# Altium PCB PCB2.PcbDoc
Units mil, origin at the board's own origin, x right, y up, seen from the top; angles counter-clockwise.
Board outline 3905 x 1880 mil, 2 copper layers (Top Layer, Bottom Layer); 34 components, 18 nets, 83 pads, 0 vias.
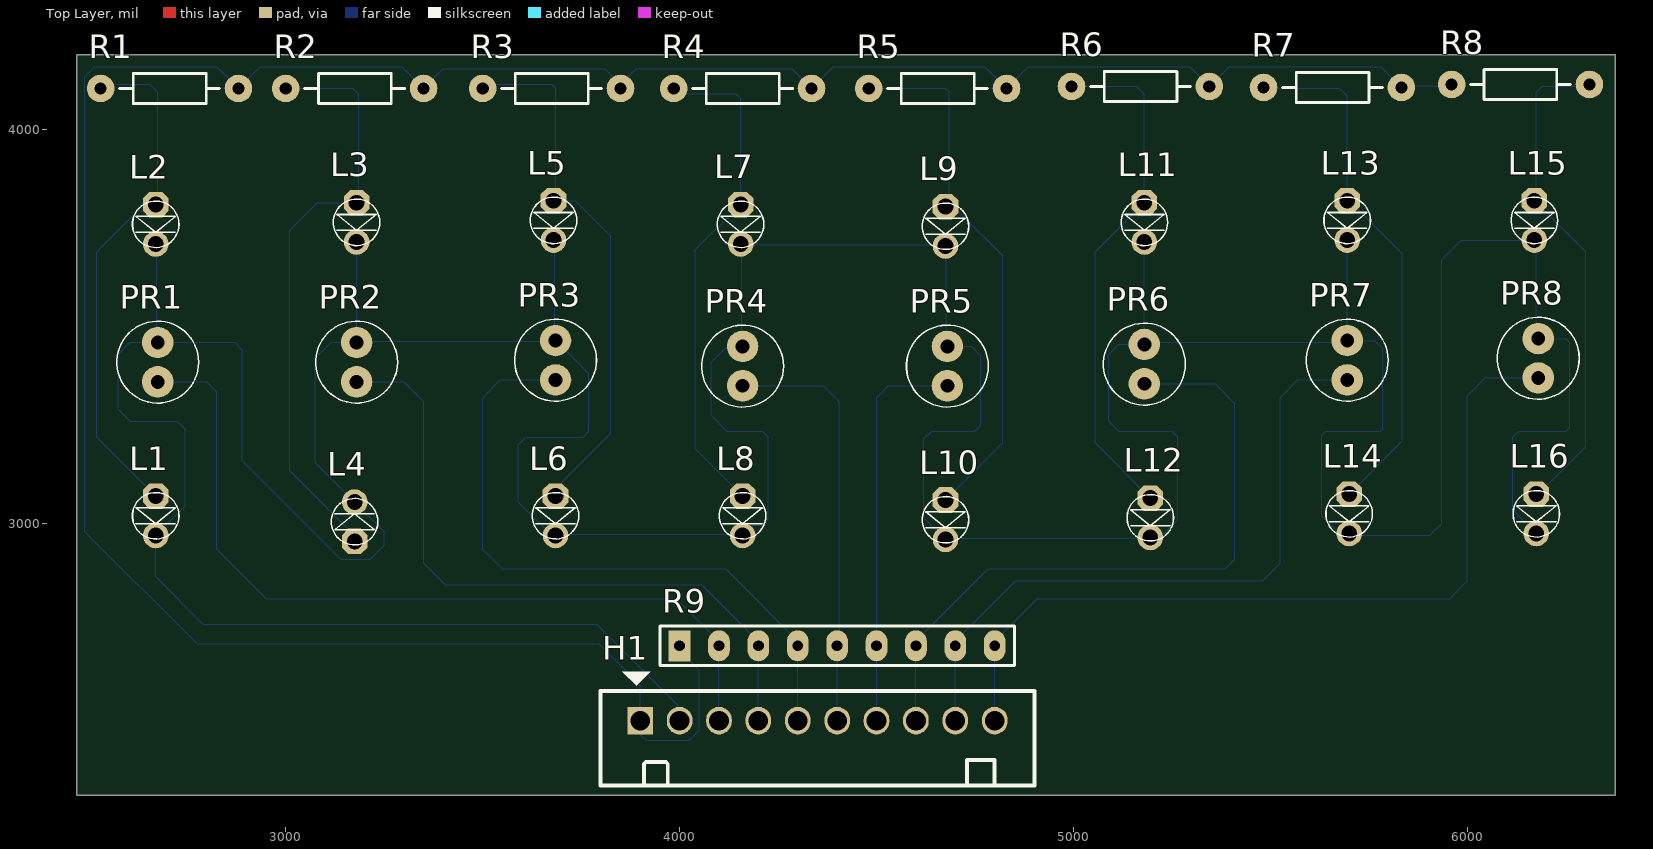
[diagram p0: Top Layer view]
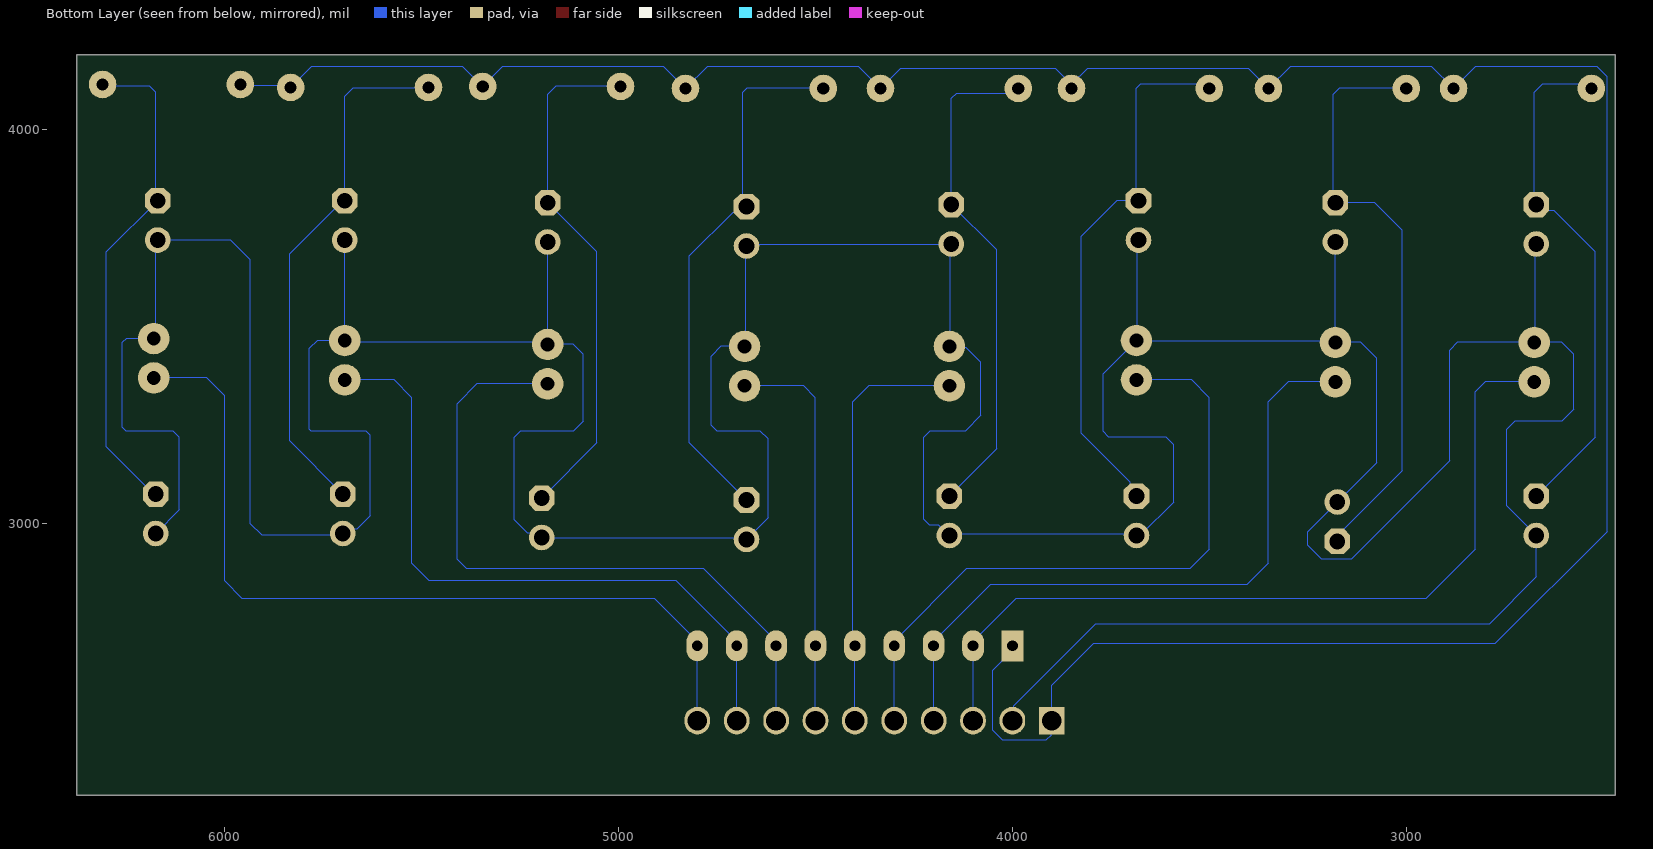
[diagram p1: Bottom Layer view, seen from below]
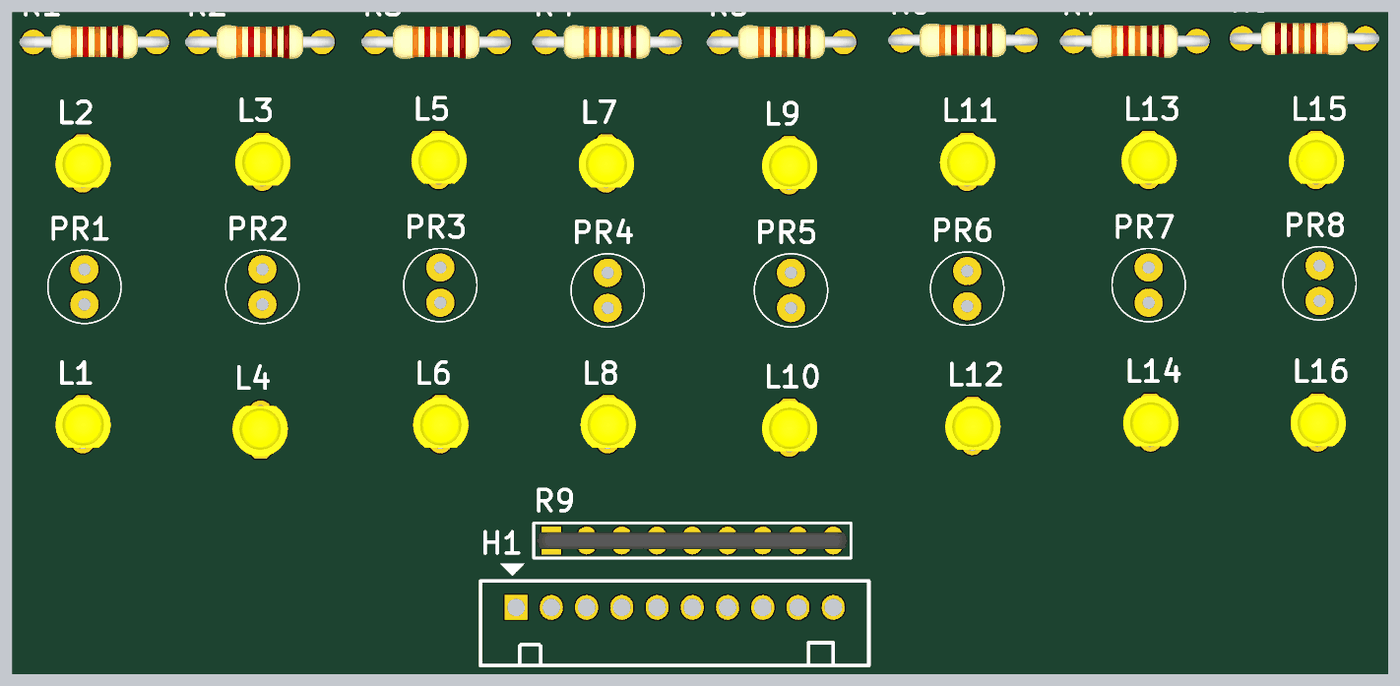
[diagram p2: 3D render of the assembled board from above, using the file's embedded part models]

## Layer stack, top to bottom
Top Solder: solder mask 0.4, Solder Resist, Dk 3.5
Top Layer: signal copper 1.4
Dielectric 1: dielectric 12.6, FR-4, Dk 4.8
Bottom Layer: signal copper 1.4
Bottom Solder: solder mask 0.4, Solder Resist, Dk 3.5

## Board outline
2470,2310 6375,2310 6375,4190 2470,4190

## Design rules (kind name [scope] priority, off if disabled: settings)
Clearance [All] p1: gap=10 ignorepadtopadclearanceinfootprint=FALSE
PolygonConnect [All] p1: connectstyle=Relief reliefconductorwidth=10 reliefentries=4 polygonreliefangle="90 Angle" airgapwidth=10
RoutingVias [All] p1: holewidth=28 width=35 viastyle="Through Hole" minholewidth=28 minwidth=35 maxholewidth=28 maxwidth=35
SolderMaskExpansion [All] p1: expansion=4 istentingtop=FALSE
SupplyNets "Schematic Supply Nets_1" [InNet('GND')] p1: voltage=0.000
SupplyNets "Schematic Supply Nets" [InNet('+5')] p2: voltage=0.000
Width [All] p1: maxlimit=2 minlimit=1 preferedwidth=1.5
30 further rules are at their usual default settings.

## Components (designator, comment, footprint, x,y, rotation, side; value= is the part's Value field where it differs from the comment)
H1 "Header 10P 2.54 Duc Cong" "Header 10P DC 2.54" 3900,2500 r270 top
L1 "LED" LED-3MM-YELLOW 2670,3070 r270 top
L2 "LED" LED-3MM-YELLOW 2670,3810 r270 top
L3 "LED" LED-3MM-YELLOW 3180,3815 r270 top
L4 "LED" LED-3MM-YELLOW 3175,2955 r90 top
L5 "LED" LED-3MM-YELLOW 3680,3820 r270 top
L6 "LED" LED-3MM-YELLOW 3685,3070 r270 top
L7 "LED" LED-3MM-YELLOW 4155,3810 r270 top
L8 "LED" LED-3MM-YELLOW 4160,3070 r270 top
L9 "LED" LED-3MM-YELLOW 4675,3805 r270 top
L10 "LED" LED-3MM-YELLOW 4675,3060 r270 top
L11 "LED" LED-3MM-YELLOW 5180,3815 r270 top
L12 "LED" LED-3MM-YELLOW 5195,3065 r270 top
L13 "LED" LED-3MM-YELLOW 5695,3820 r270 top
L14 "LED" LED-3MM-YELLOW 5700,3075 r270 top
L15 "LED" LED-3MM-YELLOW 6170,3820 r270 top
L16 "LED" LED-3MM-YELLOW 6175,3075 r270 top
PR1 "Quang Tro" "Quang Tro" 2675,3410 r270 top
PR2 "Quang Tro" "Quang Tro" 3180,3410 r270 top
PR3 "Quang Tro" "Quang Tro" 3685,3415 r270 top
PR4 "Quang Tro" "Quang Tro" 4160,3400 r270 top
PR5 "Quang Tro" "Quang Tro" 4680,3400 r270 top
PR6 "Quang Tro" "Quang Tro" 5180,3405 r270 top
PR7 "Quang Tro" "Quang Tro" 5695,3415 r270 top
PR8 "Quang Tro" "Quang Tro" 6180,3420 r270 top
R1 "220" R1/4W 2530,4105 r0 top value="R1/4W - 1K"
R2 "220" R1/4W 3000,4105 r0 top value="R1/4W - 1K"
R3 "220" R1/4W 3500,4105 r0 top value="R1/4W - 1K"
R4 "220" R1/4W 3985,4105 r0 top value="R1/4W - 1K"
R5 "220" R1/4W 4480,4105 r0 top value="R1/4W - 1K"
R6 "220" R1/4W 4995,4110 r0 top value="R1/4W - 1K"
R7 "220" R1/4W 5482.5,4107.5 r0 top value="R1/4W - 1K"
R8 "220" R1/4W 6310,4115 r180 top value="R1/4W - 1K"
R9 "10k" "tro bang a9" 4400,2695 r0 top

## Footprints (in the part's own frame and the unit in brackets; to place one, negate y for a bottom-side part, rotate by r counter-clockwise, add the part's x,y. Pads: shape width x height; smd on the part's side, far side on the other; paste and mask are expansions set on the pad)
"Header 10P DC 2.54" [mil]
  rect 70x65 hole 50: 1(0,0)
  oval 70x65 hole 50: 2(0,100) 3(0,200) 4(0,300) 5(0,400) 6(0,500) 7(0,600) 8(0,700) 9(0,800) 10(0,900)
  silkscreen extent -124,-101 165,1001
LED-3MM-YELLOW [mil]
  oct 65x65 hole 40: 1(0,0)
  round 65 hole 40: 2(100,0)
  silkscreen extent -9,-59 109,59, body extent -27,-77 117,80, height 181
"Quang Tro" [mil]
  round 80 hole 35: 1(-50,0) 2(50,0)
  silkscreen extent -104,-104 104,104
R1/4W [mil] "R 1/4W, 2 Pin, 350mil"
  round 70 hole 31: 1(0,0) 2(350,0)
  silkscreen extent 48,-38 302,38, body extent -40,-47 386,47, height 111
"tro bang a9" [mm]
  rect 1.4x2 hole 0.7: 1(-10.16,-0.127)
  oval 1.4x2 hole 0.7: 2(-7.62,-0.127) 3(-5.08,-0.127) 4(-2.54,-0.127) 5(0,-0.127) 6(2.54,-0.127) 7(5.08,-0.127) 8(7.62,-0.127) 9(10.16,-0.127)
  silkscreen extent -11.43,-1.4 11.43,1.14, body extent -11.25,-0.76 11.25,0.49, height 5.57

## Part data
H1: "Cắm", Chung_Loai=Cắm, Don_Vi=Con, Ma_Hang=MH007094, Ten_Linh_Kien="Header 10P XH2.54-10P Đực Cong"
L1 L2 L3 L4 L5 L6 L7 L8 L9 L10 L11 L12 L13 L14 L15 L16: library part "LED 3mm Vang", "Cắm", Chung_Loai=Cắm, Don_Vi=Con, Ma_Hang=MH003893, Ten_Linh_Kien="Led 3MM Phủ Vàng (10c)"
PR1 PR2 PR3 PR4 PR5 PR6 PR7 PR8: "Photoresistor", Creator="Bien Nguyen"
R1 R2 R3 R4 R5 R6 R7 R8: library part R1/4W, "Resistor 1/4W"
R9: library part "Tro Bang A9 10k", "Cắm", Chung_Loai=Cắm, Don_Vi=Con, Ma_Hang=MH001442, So_Chan=9, Ten_Linh_Kien="Trở Băng A09-103 10k 1/8w 5%"

## Nets (pads, with @x,y where several pads share a name; then routed paths per layer and width w, separated by ;. In a path a pad name is that pad's centre, name@x,y a point inside that pad or via, vN(x,y) a via of type N, cw(c..) or ccw(c..) an arc to the next point about the centre after c; other vN are vias at no path point)
+5: H1.1 R1.2 R2.2 R3.2 R4.2 R5.2 R6.2 R7.2 R8.2 R9.1 | length 7021.7
  Bottom Layer w2: R3.2 R3.2@3850,4115 ; R9.1 4000,2678.19 4050,2628.19 4050,2475 4025,2450 3915,2450 3901.83,2463.17 3901.83,2498.17 H1.1 3900,2590 3795,2695 2775,2695 2490,2980 2490,4135 2515,4160 2825,4160 R1.2 2935,4160 3295,4160 R2.2 3400,4155 3810,4155 R3.2@3850,4115 ; R8.2 5956.25,4111.25 5836.25,4111.25 R7.2 5780,4160 5395,4160 R6.2 5295,4160 4885,4160 R5.2 4775,4160 4390,4160 R4.2 4285,4155 3890,4155 R3.2@3850,4115
GND: H1.2 L1.2 L2.2 L3.2 L4.2 L5.2 L6.2 L7.2 L8.2 L9.2 L10.2 L11.2 L12.2 L13.2 L14.2 L15.2 L16.2 PR1.1 PR2.1 PR3.1 PR4.1 PR5.1 PR6.1 PR7.1 PR8.1 | length 14155.7
  Bottom Layer w2: L2.2 2672.5,3707.5 2672.5,3462.5 PR1.1 ; L3.2@3182.5,3717.5 L3.2 PR2.1 ; L5.2@3677.5,3717.5 L5.2 3682.5,3717.5 3682.5,3467.5 PR3.1 ; H1.2 3997,2503 3997,2538 3790,2745 2790,2745 2670,2865 L1.2 2745,3045 2745,3240 2725,3260 2605,3260 2575,3290 2575,3430 2605,3460 PR1.1 ; L7.2 L7.2@4157.5,3707.5 ; L11.2 PR6.1 ; L13.2 PR7.1 ; L16.2 6115,3035 6115,3220 6130,3235 6250,3235 6260,3245 6260,3460 6250,3470 PR8.1 6175,3475 6175,3715 L15.2 5985,3720 5935,3670 5935,3000 5905,2970 5705,2970 L14.2 5689.5,2985.5 5664.5,2985.5 5630,3020 5630,3225 5640,3235 5780,3235 5785,3240 5785,3445 5765,3465 PR7.1 ; PR1.1 2870,3460 2890,3440 2890,3160 3140,2910 3215,2910 3250,2945 3250,2980 L4.2 3075,3155 3075,3420 3115,3460 PR2.1 ; PR2.1 3182.5,3462.5 3682.5,3462.5 PR3.1 ; PR3.1 3770,3380 3770,3235 3755,3220 3610,3220 3590,3200 3590,3055 3675,2970 L6.2 3687.5,2972.5 4157.5,2972.5 L8.2 4186.61,2996.61 4210.44,2996.61 4225,3011.17 4225,3220 4210,3235 4120,3235 4080,3275 4080,3410 4117,3447 4157,3447 PR4.1 4157.5,3452.5 L7.2@4157.5,3707.5 ; L7.2@4157.5,3707.5 4672.5,3707.5 L9.2 4677.5,3702.5 4677.5,3452.5 PR5.1 4740,3450 4765,3425 4765,3250 4750,3235 4640,3235 4620,3215 4620,3015 L10.2 4677.5,2962.5 5192.5,2962.5 L12.2 5205.5,2975.5 5230.5,2975.5 5265,3010 5265,3220 5250,3235 5115,3235 5090,3260 5090,3430 5115,3455 PR6.1 ; PR6.1 5185,3460 5690,3460 PR7.1
NetH1_3: H1.3 PR1.2 R9.2 | length 2133.8
  Bottom Layer w2: PR1.2 2800,3360 2825,3335 2825,2935 2950,2810 3991.81,2810 4100,2701.81 R9.2 H1.3
NetH1_4: H1.4 PR2.2 R9.3 | length 1734.6
  Bottom Layer w2: PR2.2 3300,3360 3350,3310 3350,2900 3405,2845 4056.81,2845 4200,2701.81 R9.3 H1.4
NetH1_5: H1.5 PR3.2 R9.4 | length 1687
  Bottom Layer w2: PR3.2 3545,3365 3500,3320 3500,2935 3550,2885 4116.81,2885 4300,2701.81 R9.4 H1.5
NetH1_6: H1.6 PR4.2 R9.5 | length 1073.6
  Bottom Layer w2: PR4.2 4365,3350 4405,3310 4405,2695 R9.5 H1.6
NetH1_7: H1.7 PR5.2 R9.6 | length 1012.4
  Bottom Layer w2: H1.7 R9.6 4500,3320 4530,3350 PR5.2
NetH1_8: H1.8 PR6.2 R9.7 | length 1743.8
  Bottom Layer w2: H1.8 R9.7 4600,2701.81 4783.19,2885 5385,2885 5410,2910 5410,3305 5360,3355 PR6.2
NetH1_9: H1.9 PR7.2 R9.8 | length 1717.5
  Bottom Layer w2: H1.9 R9.8 4700,2701.81 4853.19,2855 5480,2855 5525,2900 5525,3320 5570,3365 PR7.2
NetH1_10: H1.10 PR8.2 R9.9 | length 2133.9
  Bottom Layer w2: H1.10 R9.9 4800,2701.81 4908.19,2810 5955,2810 6000,2855 6000,3325 6045,3370 PR8.2
NetL1_1: L1.1 L2.1 R1.1 | length 1326.3
  Bottom Layer w2: R1.1 2540,4115 2655,4115 2675,4095 2675,3815 L2.1 2654.75,3794.75 2624.75,3794.75 2520,3690 2520,3220 L1.1
NetL3_1: L3.1 L4.1 R2.1 | length 1525.6
  Bottom Layer w2: R2.1 3170,4105 3185,4090 3185,3820 L3.1 3080,3815 3010,3745 3010,3134.84 3175,2969.84 L4.1
NetL5_1: L5.1 L6.1 R3.1 | length 1380.6
  Bottom Layer w2: R3.1 3510,4115 3675,4115 3685,4105 3685,3825 L5.1 3735,3820 3825,3730 3825,3230 3700.5,3105.5 3700.5,3085.5 L6.1
NetL7_1: L7.1 L8.1 R4.1 | length 1287.7
  Bottom Layer w2: R4.1 3998.01,4091.99 4020.01,4091.99 4020.17,4091.83 4143.17,4091.83 4155,4080 L7.1 4040,3695 4040,3190 L8.1
NetL9_1: L9.1 L10.1 R5.1 | length 1380.1
  Bottom Layer w2: R5.1 4675,4105 4685,4095 4685,3815 L9.1 4690.5,3789.5 4710.5,3789.5 4820,3680 4820,3205 L10.1
NetL11_1: L11.1 L12.1 R6.1 | length 1328.1
  Bottom Layer w2: R6.1 5160,4110 5180,4090 L11.1 5055,3690 5055,3205 L12.1
NetL13_1: L13.1 L14.1 R7.1 | length 1348.7
  Bottom Layer w2: R7.1 5485,4105 5675,4105 5695,4085 L13.1 5700,3820 5835,3685 5835,3210 L14.1
NetL15_1: L15.1 L16.1 R8.1 | length 1273.9
  Bottom Layer w2: L16.1 6180,3075 6300,3195 6300,3690 L15.1 6175,3825 6175,4095 6190,4110 6305,4110 R8.1